# Altium PCB PCB1.PcbDoc
Units mil, origin at the board's own origin, x right, y up, seen from the top; angles counter-clockwise.
Board outline 1925 x 1825 mil, 2 copper layers (Top Layer, Bottom Layer); 21 components, 29 nets, 114 pads, 7 vias.
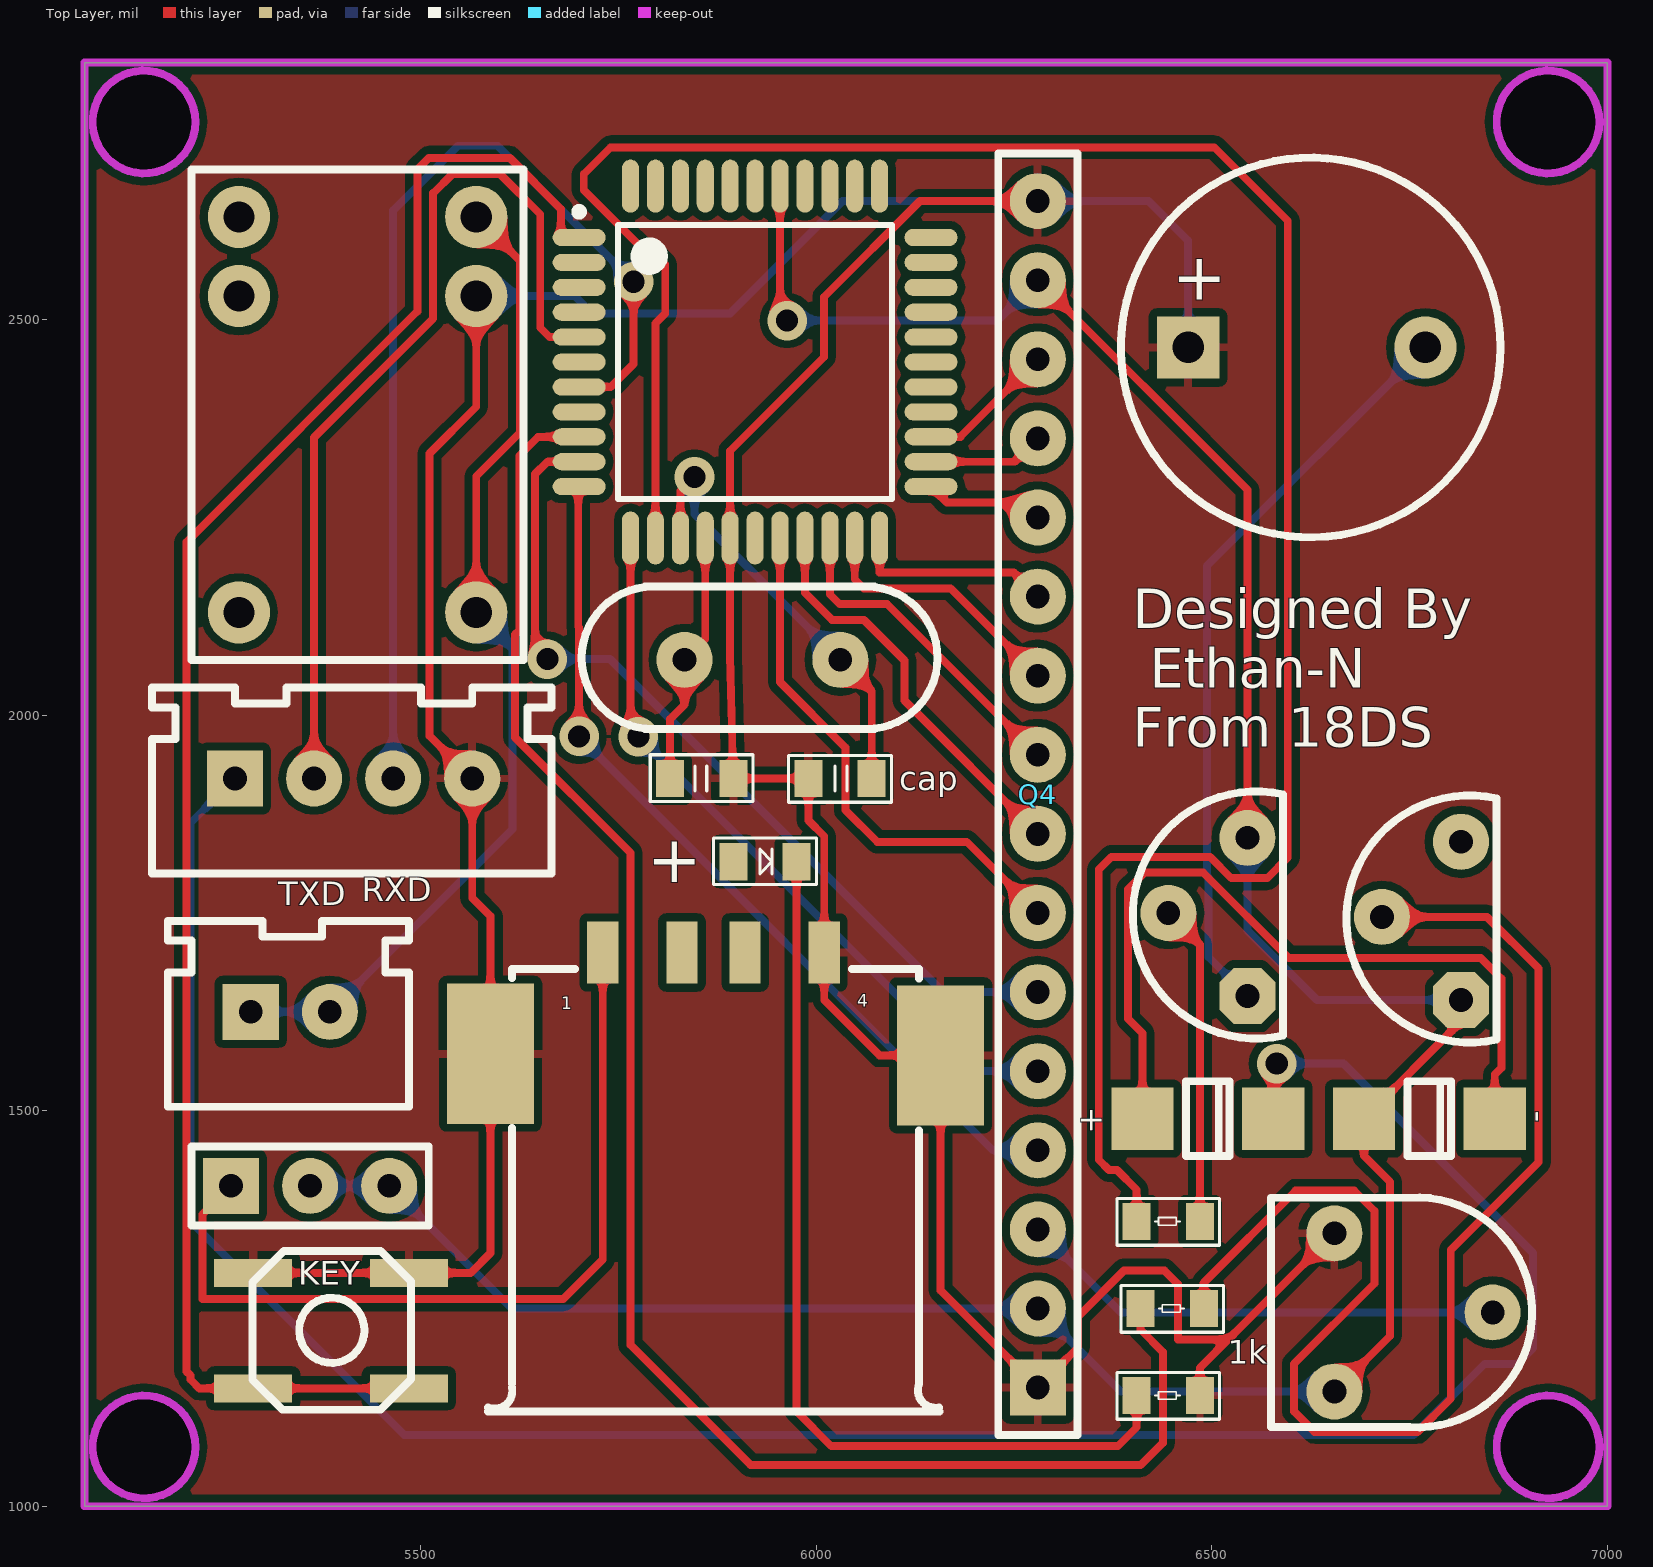
[diagram p0: Top Layer view]
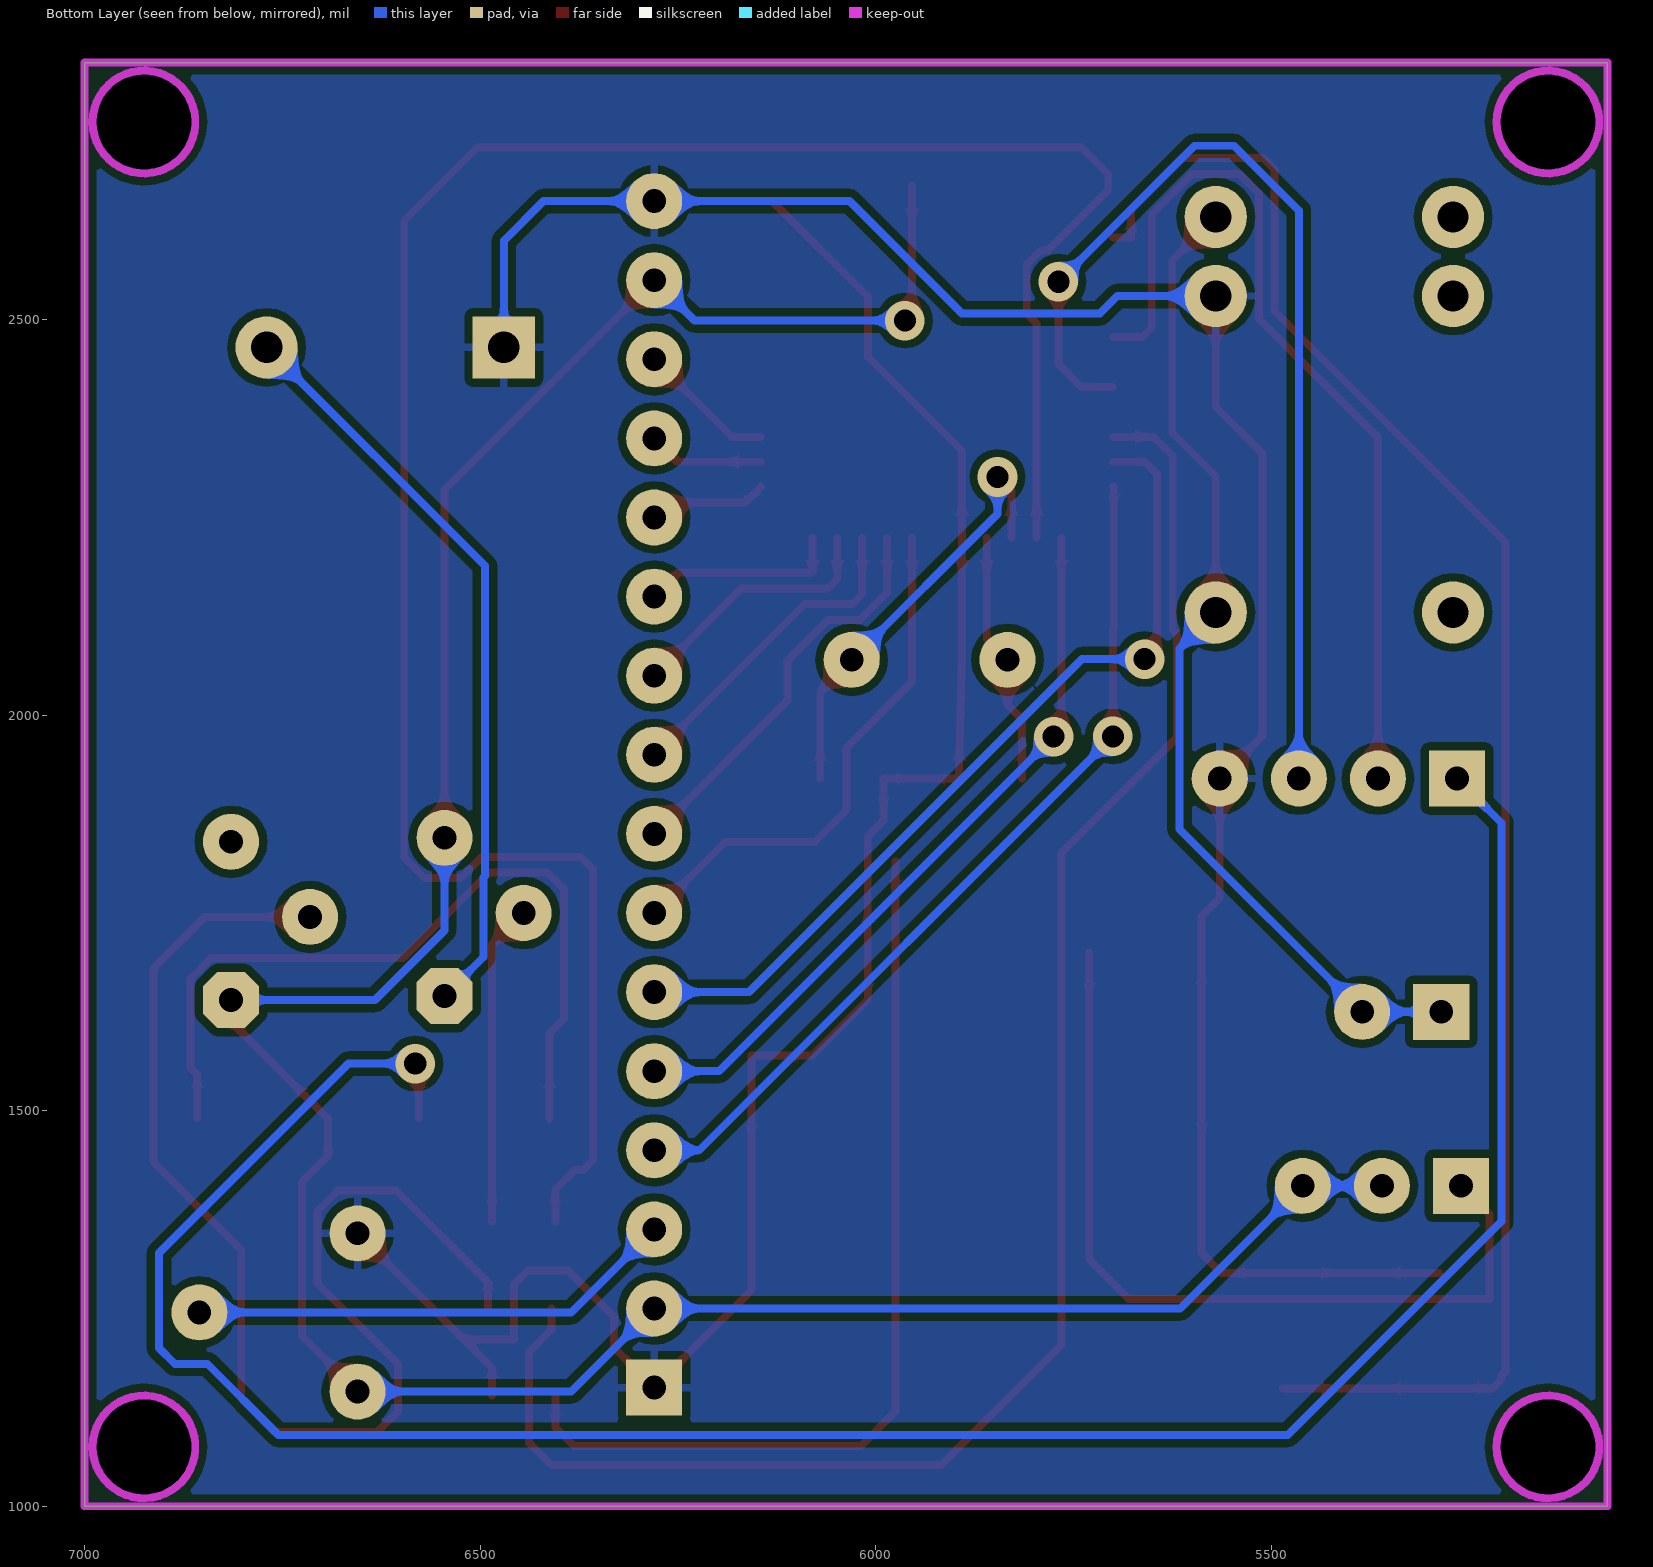
[diagram p1: Bottom Layer view, seen from below]

## Layer stack, top to bottom
Top Solder: solder mask 0.4, Solder Resist, Dk 3.5
Top Layer: signal copper 1.4
Dielectric 1: dielectric 12.6, FR-4, Dk 4.8
Bottom Layer: signal copper 1.4
Bottom Solder: solder mask 0.4, Solder Resist, Dk 3.5

## Board outline
5075,1000 7000,1000 7000,2825 5075,2825
cut-out: 5085.04,1075 ccw(c5150,1075) 5150,1010.04 ccw(c5150,1075) 5214.96,1075 ccw(c5150,1075) 5150,1139.96 ccw(c5150,1075)
cut-out: 6860.04,1075 ccw(c6925,1075) 6925,1010.04 ccw(c6925,1075) 6989.96,1075 ccw(c6925,1075) 6925,1139.96 ccw(c6925,1075)
cut-out: 6860.04,2750 ccw(c6925,2750) 6925,2685.04 ccw(c6925,2750) 6989.96,2750 ccw(c6925,2750) 6925,2814.96 ccw(c6925,2750)
cut-out: 5085.04,2750 ccw(c5150,2750) 5150,2685.04 ccw(c5150,2750) 5214.96,2750 ccw(c5150,2750) 5150,2814.96 ccw(c5150,2750)

## Design rules (kind name [scope] priority, off if disabled: settings)
Clearance [All] p1: gap=10 ignorepadtopadclearanceinfootprint=FALSE except(0: Arc-Hole Track-Hole SMDPad-Hole THPad-Hole Via-Hole Fill-Hole Poly-Hole Region-Hole Text-Hole)
PolygonConnect [All] p1: connectstyle=Relief reliefconductorwidth=10 reliefentries=4 polygonreliefangle="90 Angle" airgapwidth=10
RoutingVias [All] p1: holewidth=28 width=50 viastyle="Through Hole" minholewidth=28 minwidth=50 maxholewidth=28 maxwidth=50
SolderMaskExpansion [All] p1: expansion=4
Width [All] p1: maxlimit=10 minlimit=10 preferedwidth=10
30 further rules are at their usual default settings.

## Classes and differential pairs
component class AS608+LCD: 1k + KEY Q4 ""

## Components (designator, comment, footprint, x,y, rotation, side; value= is the part's Value field where it differs from the comment)
1k "1K" 0805R 6380,1110 r0 top (schematic designator R1)
+ "LED-YELLOW" 0805D 6000,1845 r180 top (schematic designator D3)
C? "Cap" 0805C 5920,1950 r180 top value=30pF
C? "Cap" 0805C 5965,1890 r0 top value=30pF
D1 "1N4007" SMA(DO-214AC)_S3 6495,1490 r180 top
D2 "1N4007" SMA(DO-214AC)_S3 6775,1490 r180 top
KEY "功能按键" SW5*5 5287,1122 r0 top
Q1 "S8550" 三极管 6865,1580 r90 top
Q2 "蜂鸣器" 蜂鸣器 6470.34,2464.65 r0 top
Q3 "S8550" 三极管 6595,1585 r90 top
Q4 "LCD1602" HDR16 6335,1085 r90 top
R2 "1K" 0805R 6385,1220 r0 top
R3 "1K" 0805R 6380,1330 r0 top
R4 "10K" Res-JT 6910,1395 r180 top
SW? "双掷开关" SS12D07G5 5205,1350 r0 top
U1 "接线柱" XH2P 5175,1500 r0 top
U2 "STC89CXX" LQFP44 5654.56,2181.5 r0 top
U3 "USB-A" USB-A贴片 5585,1120 r0 top
U? "s" XH4P 5155,1795 r0 top
? "继电器HK4100F" HK4100F 5630,2070 r90 top
? "12MHZ" XTAL 6030,2070 r180 top

## Footprints (in the part's own frame and the unit in brackets; to place one, negate y for a bottom-side part, rotate by r counter-clockwise, add the part's x,y. Pads: shape width x height; smd on the part's side, far side on the other; paste and mask are expansions set on the pad)
0805C [mm]
  rect 0.9x1.2 smd: 1(2.667,0.762) 2(0.635,0.762)
  silkscreen extent 0,0 3.3,1.5
0805D [mm]
  rect 0.9x1.2 smd: 1(2.667,0.762) 2(0.635,0.762)
  silkscreen extent 0,0 3.3,1.5
0805R [mm]
  rect 0.9x1.2 smd: 1(2.667,0.762) 2(0.635,0.762)
  silkscreen extent 0,0 3.3,1.5
HDR16 [mil]
  rect 70.87x70.87 hole 30: 1(65,55)
  round 70.87 hole 30: 2(165,55) 3(265,55) 4(365,55) 5(465,55) 6(565,55) 7(665,55) 8(765,55) 9(865,55) 10(965,55) 11(1065,55) 12(1165,55) 13(1265,55) 14(1365,55) 15(1465,55) 16(1565,55)
  silkscreen extent 5,5 1625,105
HK4100F [mm]
  round 2 hole 1: 1(1.524,9.144) 2(11.684,9.144) 3(14.224,9.144) 4(14.224,1.524) 5(11.684,1.524) 6(1.524,1.524)
  silkscreen extent 0,0 15.75,10.67
LQFP44 [mm]
  oval 1.7x0.55 smd: 1(1.157,10.731) 2(1.157,9.931) 3(1.157,9.131) 4(1.157,8.331) 5(1.157,7.531) 6(1.157,6.731) 7(1.157,5.931) 8(1.157,5.131) 9(1.157,4.331) 10(1.157,3.531) 11(1.157,2.731) 23(12.457,2.731) 24(12.457,3.531) 25(12.457,4.331) 26(12.457,5.131) 27(12.457,5.931) 28(12.457,6.731) 29(12.457,7.531) 30(12.457,8.331) 31(12.457,9.131) 32(12.457,9.931) 33(12.457,10.731)
  oval 0.55x1.7 smd: 12(2.807,1.081) 13(3.607,1.081) 14(4.407,1.081) 15(5.207,1.081) 16(6.007,1.081) 17(6.807,1.081) 18(7.607,1.081) 19(8.407,1.081) 20(9.207,1.081) 21(10.007,1.081) 22(10.807,1.081) 34(10.807,12.381) 35(10.007,12.381) 36(9.207,12.381) 37(8.407,12.381) 38(7.607,12.381) 39(6.807,12.381) 40(6.007,12.381) 41(5.207,12.381) 42(4.407,12.381) 43(3.607,12.381) 44(2.807,12.381)
  silkscreen extent 1.03,2.33 11.21,11.68, body extent 1.81,1.73 11.81,11.73, height 1.2
Res-JT [mil]
  round 70.87 hole 30: 1(255,250) 2(255,50) 3(55,150)
  silkscreen extent 5,5 335,295
SMA(DO-214AC)_S3 [mm]
  rect 2x2 smd: 1(2.1,0) 2(-2.1,0)
  silkscreen extent -0.7,-1.2 0.7,1.2
SS12D07G5 [mil]
  rect 70.87x70.87 hole 30: 1(55,55)
  round 70.87 hole 30: 2(155,55) 2(255,55)
  silkscreen extent 5,5 305,105
SW5*5 [mil]
  rect 98.43x35.43 smd: 1(1,173) 1(198,173) 2(1,27) 2(198,27)
  silkscreen extent 0,0 201,201
USB-A贴片 [mm]
  rect 1x2 smd: 1(3.683,14.732) 2(6.223,14.732) 3(8.255,14.732) 4(10.795,14.732)
  rect 2.8x4.5 smd: 5(0.076,11.481) 5(14.529,11.43)
  silkscreen extent 0,0 14.5,14.2
XH2P [mil]
  rect 70.87x70.87 hole 30: 1(110,125)
  round 70.87 hole 30: 2(210,125)
  silkscreen extent 5,5 310,240
XH4P [mil]
  rect 70.87x70.87 hole 30: 1(110,125)
  round 70.87 hole 30: 2(210,125) 3(310,125) 4(410,125)
  silkscreen extent 5,5 510,240
XTAL [mm]
  round 1.8 hole 0.76: 1(-0.008,-0.001) 2(4.996,-0.001)
  silkscreen extent -3.13,-2.35 8.3,2.22
三极管 [mil]
  oct 70.87x70.87 hole 30: 1(60,50)
  round 70.87 hole 30: 2(165,150) 3(260,50)
  silkscreen extent 6,5 319,195
蜂鸣器 [mm]
  rect 2x2 hole 1.016: 1(-0.009,0.009)
  round 2 hole 1.016: 2(7.611,0.009)
  silkscreen extent -2.16,-6.09 10.02,6.1

## Part data
1k R2 R3: library part RES
C? C?: "Capacitor", LatestRevisionDate=17-Jul-2002, LatestRevisionNote="Re-released for DXP Platform.", PackageDescription="Radial Cap, Thru-Hole; 2 Leads; 0.3 in Pin Spacing", PackageReference=RAD-0.3, Published=8-Jun-2000, Publisher="Altium Limited"
KEY: library part 微动开关
R4: library part 电位器
U?: library part AS608
?: library part XTAL

## Via types
v1: diameter 50, hole 28, Top Layer to Bottom Layer, 7 vias

## Nets (pads, with @x,y where several pads share a name; then routed paths per layer and width w, separated by ;. In a path a pad name is that pad's centre, name@x,y a point inside that pad or via, vN(x,y) a via of type N, cw(c..) or ccw(c..) an arc to the next point about the centre after c; other vN are vias at no path point)
E: Q4.6 U2.10 | length 1097
  Top Layer w10: v1(5660,2071) 5644.37,2086.63 5644.37,2304.88 5660,2320.51 U2.10
  Bottom Layer w10: v1(5660,2071) 5739,2071 6160,1650 Q4.6
GND: 1k.1 ?.5 C?.2 KEY.1 Q2.1 Q4.1 Q4.16 R4.2 U2.16 U3.4 U3.5 U?.4 | length 5386.7
  Top Layer w10: KEY.1@5288,1295 5485,1295 5563,1295 5588,1320 5588,1572 5588,1746 5565,1769 U?.4 5511,1974 5511,2331 5570,2390 ?.5 ; Q4.16 6131,2650 6009.9,2528.9 6009.9,2453.04 5891.06,2334.21 U2.16 5891.06,2075.94 5895,1920 5990,1920 5990,1867 6010,1847 U3.4 6010,1640 6080,1570 6157,1570 6157,1273 Q4.1 6331,1201 6331,1240 6389,1298 6440,1298 6457,1281 6457,1211 6521,1211 ; 1k.1 6485,1175 6521,1211 ; R4.2 6521,1211
  Bottom Layer w10: ?.5 5694.46,2530 5716.57,2507.88 5890.9,2507.88 6033.01,2650 Q4.16 6420,2650 6470,2600 Q2.1
Net_1: ?.1@6030.32,2070.02 C?.1@6070,1920 U2.14 | length 558.6
  Top Layer w10: U2.14 5828.07,2283.28 v1(5846,2301.21) ; ?.1@6030.32,2070.02 6070,2030.34 C?.1@6070,1920
  Bottom Layer w10: v1(5846,2301.21) 5846,2254.34 ?.1@6030.32,2070.02
Net_2: ?.2@5833.32,2070.02 C?.1@5815,1920 U2.15 | length 322.5
  Top Layer w10: C?.1@5815,1920 5815,1995 5833.32,2013.32 5833.32,2070.02 5859.57,2096.27 U2.15
Net_4: ?.4 ?.6 U1.1 U1.2 | length 1265.3
  Top Layer w10: ?.6 5570,2302 5625,2357 5625,2575 ?.4
  Bottom Layer w10: U1.1 U1.2 5616,1856 5616,2084 ?.6
NetD1_1: D1.1 D2.2 | length 1014.2
  Top Layer w10: D1.1 6412.32,1598 6394,1616.32 6394,1780 6415,1801 6489.18,1801 6597.18,1693 6840,1693 6866,1667 6866,1554 6857.68,1545.68 D2.2
NetD1_2: D1.2 U?.1 | length 3052.3
  Top Layer w10: D1.2 6577.68,1555.36 v1(6582,1559.68)
  Bottom Layer w10: U?.1 5209,1864 5209,1360 5479,1090 6755,1090 6845,1180 6886,1180 6906,1200 6906,1320 6666.32,1559.68 v1(6582,1559.68)
NetD3_2: 1k.2 +.2 | length 1193.2
  Top Layer w10: +.2 5975,1120 6019,1076 6381,1076 6405,1100 1k.2
NetKEY_2: KEY.2 U2.1 | length 2206.7
  Top Layer w10: KEY.2@5485,1149 5288,1149 5220,1149 5209,1160 5209,1165.21 5203.79,1170.43 5203.79,2218.79 5495.63,2510.63 5495.63,2690 5510,2704.37 5612.63,2704.37 5677,2640 5677,2603.98 U2.1
NetQ1_2: Q1.2 R2.1 | length 1643.7
  Top Layer w10: R2.1 6490,1283 6606,1399 6680,1399 6705.43,1373.57 6705.43,1281.43 6604,1180 6604,1120 6630,1094 6760,1094 6802,1136 6802,1324 6913,1435 6913,1680 6848,1745 Q1.2
NetQ2_2: Q2.2 Q3.1 | length 955.4
  Bottom Layer w10: Q3.1 6496,1694 6496,1795 6494,1797 6494,2189 Q2.2
NetQ3_2: Q3.2 R3.1 | length 406.6
  Top Layer w10: Q3.2 6485,1710 R3.1
NetQ4_3: Q4.3 R4.3 | length 618.5
  Bottom Layer w10: Q4.3 6385,1245 R4.3
NetQ4_7: Q4.7 U2.18 | length 675.3
  Top Layer w10: U2.18 5954.06,2042 6037,1959.06 6037,1880 6077,1840 6190,1840 Q4.7
NetQ4_8: Q4.8 U2.19 | length 519.6
  Top Layer w10: U2.19 5985.55,2154.91 6020,2120.46 6060.29,2120.46 6111.52,2069.23 6111.52,2018.48 Q4.8
NetQ4_9: Q4.9 U2.20 | length 418.1
  Top Layer w10: U2.20 6017.05,2153 6029.59,2140.46 6089.54,2140.46 Q4.9
NetQ4_10: Q4.10 U2.21 | length 334.1
  Top Layer w10: U2.21 6048.54,2171.91 6060,2160.46 6169.54,2160.46 Q4.10
NetQ4_11: Q4.11 U2.22 | length 256.2
  Top Layer w10: U2.22 6080.04,2180.46 6249.54,2180.46 Q4.11
NetQ4_12: Q4.12 U2.23 | length 162.3
  Top Layer w10: U2.23 6165.02,2269 6280,2269 Q4.12
NetQ4_13: Q4.13 U2.24 | length 147.2
  Top Layer w10: U2.24 6250.51,2320.51 Q4.13
NetQ4_14: Q4.14 U2.25 | length 175.6
  Top Layer w10: U2.25 6182.01,2352.01 Q4.14
NetR2_2: R2.2 U2.9 | length 2201.6
  Top Layer w10: U2.9 5648.29,2352.01 5624.37,2328.09 5624.37,2107.48 5619,2102.11 5619,1972 5765,1826 5765,1204 5917,1052 6410,1052 6438,1080 6438,1195 6410,1223 R2.2
NetR3_2: R3.2 U2.13 | length 2999
  Top Layer w10: U2.13 5796.57,2495.46 5809,2507.88 5809,2570 5791.43,2587.57 5782.43,2587.57 5706,2664 5706,2684 5740,2718 6503,2718 6596,2625 6596,1820 6570,1794 6524.67,1794 6497.67,1821 6373,1821 6357,1805 6357,1438 6370,1425 6380,1425 6405,1400 R3.2
NetSW?_1: SW?.1 U3.1 | length 1072.9
  Top Layer w10: SW?.1 5223.79,1368.79 5223.79,1262 5680,1262 5730,1312 U3.1
NetU2_5: U2.5 U?.2 | length 1166.4
  Top Layer w10: U?.2 5365,2351 5515.63,2501.63 5515.63,2660 5540,2684.37 5600,2684.37 5651,2633.37 5651,2490 5663.01,2477.99 U2.5
NetU2_7: U2.7 U?.3 | length 1312.1
  Top Layer w10: U2.7 5740,2415 5769,2444 v1(5769,2548)
  Bottom Layer w10: U?.3 5465,2638 5547,2720 5597,2720 v1(5769,2548)
R/W: Q4.5 U2.12 | length 935.4
  Top Layer w10: U2.12 5765.08,1982.92 v1(5775,1973)
  Bottom Layer w10: v1(5775,1973) 6198,1550 Q4.5
RS: Q4.4 U2.11 | length 1114.1
  Top Layer w10: v1(5700,1973.18) 5700,2111 5699,2112 5699,2289.02 U2.11
  Bottom Layer w10: v1(5700,1973.18) 6223.18,1450 Q4.4
VCC: D2.1 Q1.1 Q3.3 Q4.2 Q4.15 R4.1 SW?.2 U2.38 | length 3741.4
  Top Layer w10: U2.38 5954.06,2507.94 v1(5963,2499) ; Q4.15 6545,2285 Q3.3 ; R4.1 6725.43,1215.43 6725.43,1410 6692.32,1443.11 D2.1 6815,1612.68 Q1.1
  Bottom Layer w10: SW?.2@5360,1405 5460,1405 5615,1250 Q4.2 6385,1145 R4.1 ; v1(5963,2499) 6229,2499 Q4.15 ; Q3.3 6545,1728 6633,1640 Q1.1
pads on no net: +.1 ?.1@5270,2130 ?.2@5270,2530 ?.3 Q1.3 U2.2 U2.3 U2.4 U2.6 U2.8 U2.17 U2.26 U2.27 U2.28 U2.29 U2.30 U2.31 U2.32 U2.33 U2.34 U2.35 U2.36 U2.37 U2.39 U2.40 U2.41 U2.42 U2.43 U2.44 U3.2 U3.3

## Polygon pours and split planes (outlines as drawn)
GND on Top Layer "Top Layer-No Net" (solid, pour order 0): 5075,2825 7000,2825 7000,1000 5075,1000
GND on Bottom Layer "Top Layer-No Net" (solid, pour order 2): 5075,2825 7000,2825 7000,1000 5075,1000

## Keep-outs
Keep-Out Layer:
  circle w10: c6925,2750 r64.96
  circle w10: c6925,1075 r64.96
  circle w10: c5150,1075 r64.96
  circle w10: c5150,2750 r64.96
  lines w10: 5075,1000 7000,1000 7000,2825 5075,2825 5075,1000

## Silkscreen, mask and mechanical layers (free items; w line width, h text height)
Top Overlay:
  text "Designed By /  Ethan-N / From 18DS" at 6400,1960 h50
  text "cap" at 6105,1905 h30
  text "RXD" at 5425,1765 h30
  text "TXD" at 5320,1760 h30
  text "+" at 6335,1505 h30 r270
  text "-" at 6900,1500 h30 r270

## Text inside footprints (layer, text, board x,y; h text height)
Q2: Top Overlay "+" at 6450,2525 h60
U3: Top Overlay "4" at 6051.81,1631.73 h15.75; Top Overlay "1" at 5677.8,1628.19 h15.75